# Altium PCB F4x1_Dev.PcbDoc
Units mil, origin at the board's own origin, x right, y up, seen from the top; angles counter-clockwise.
Board outline 2000 x 800 mil, 4 copper layers (Top Layer, G1, G2, Bottom Layer), stack 46.904 mil thick; 50 components, 57 nets, 232 pads, 79 vias.
Unrouted connection lines stored in the file: 3.
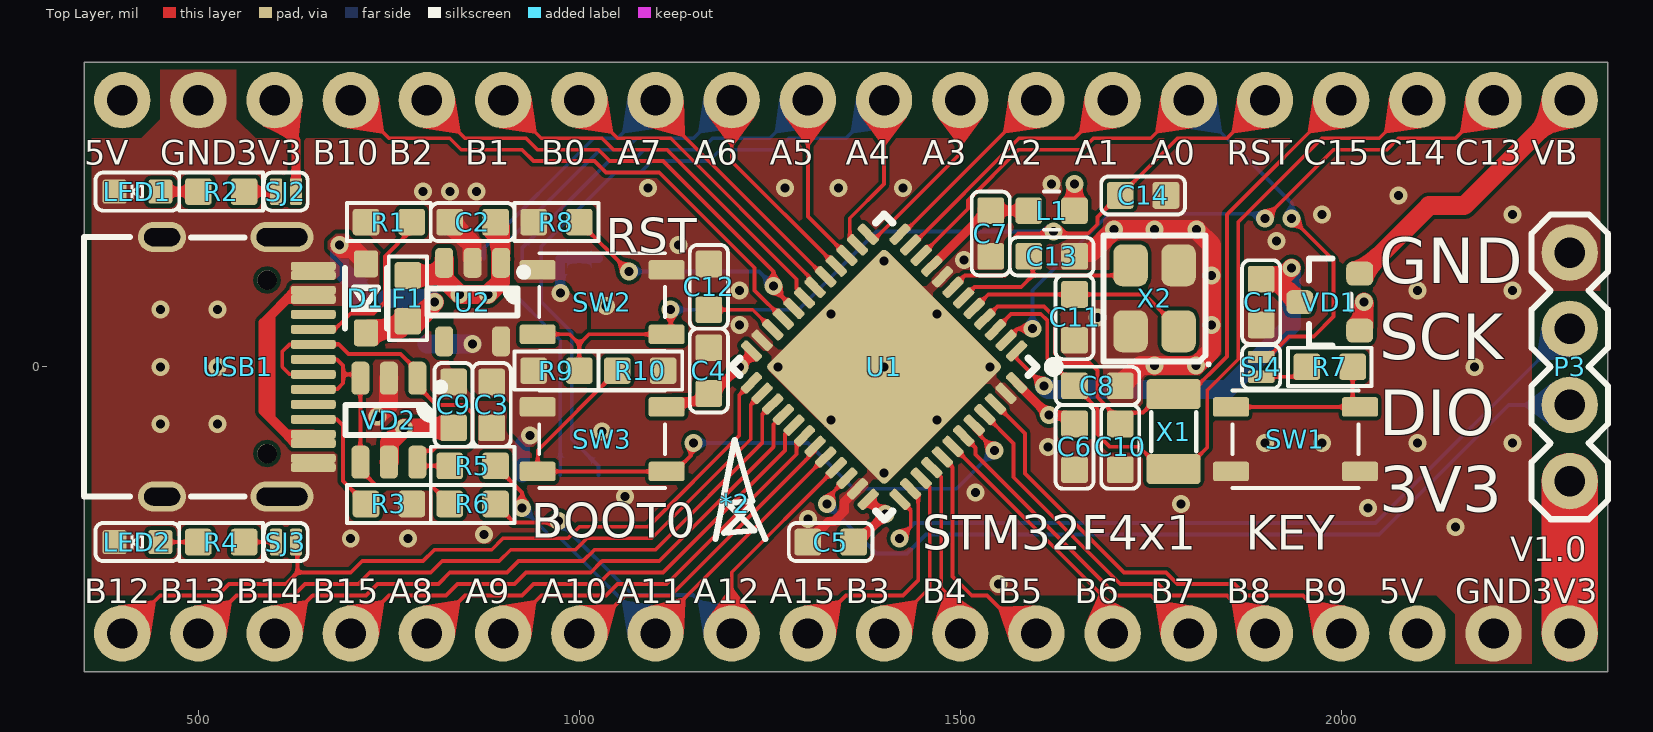
[diagram p0: Top Layer view]
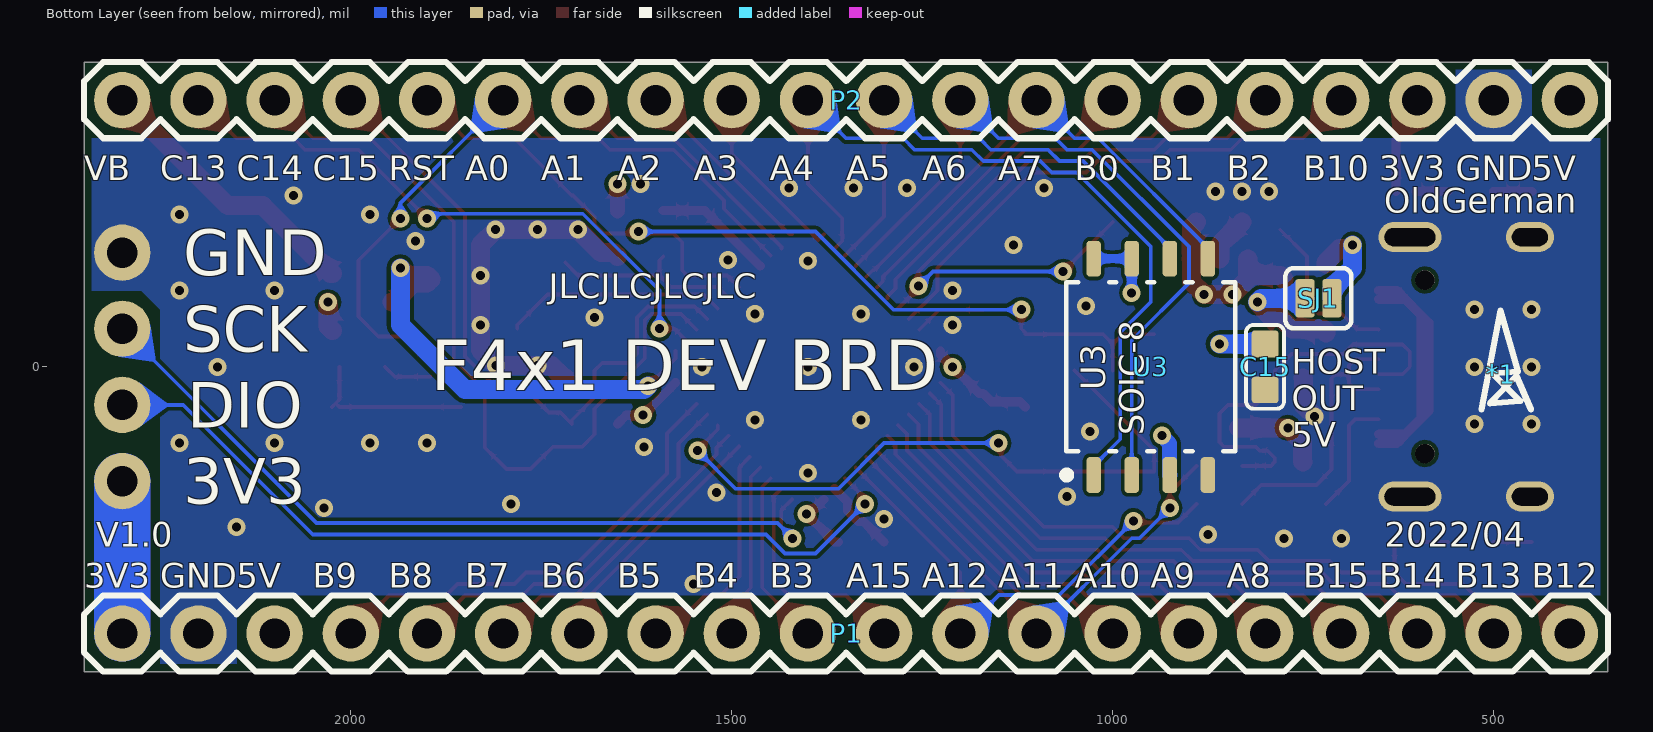
[diagram p1: Bottom Layer view, seen from below]
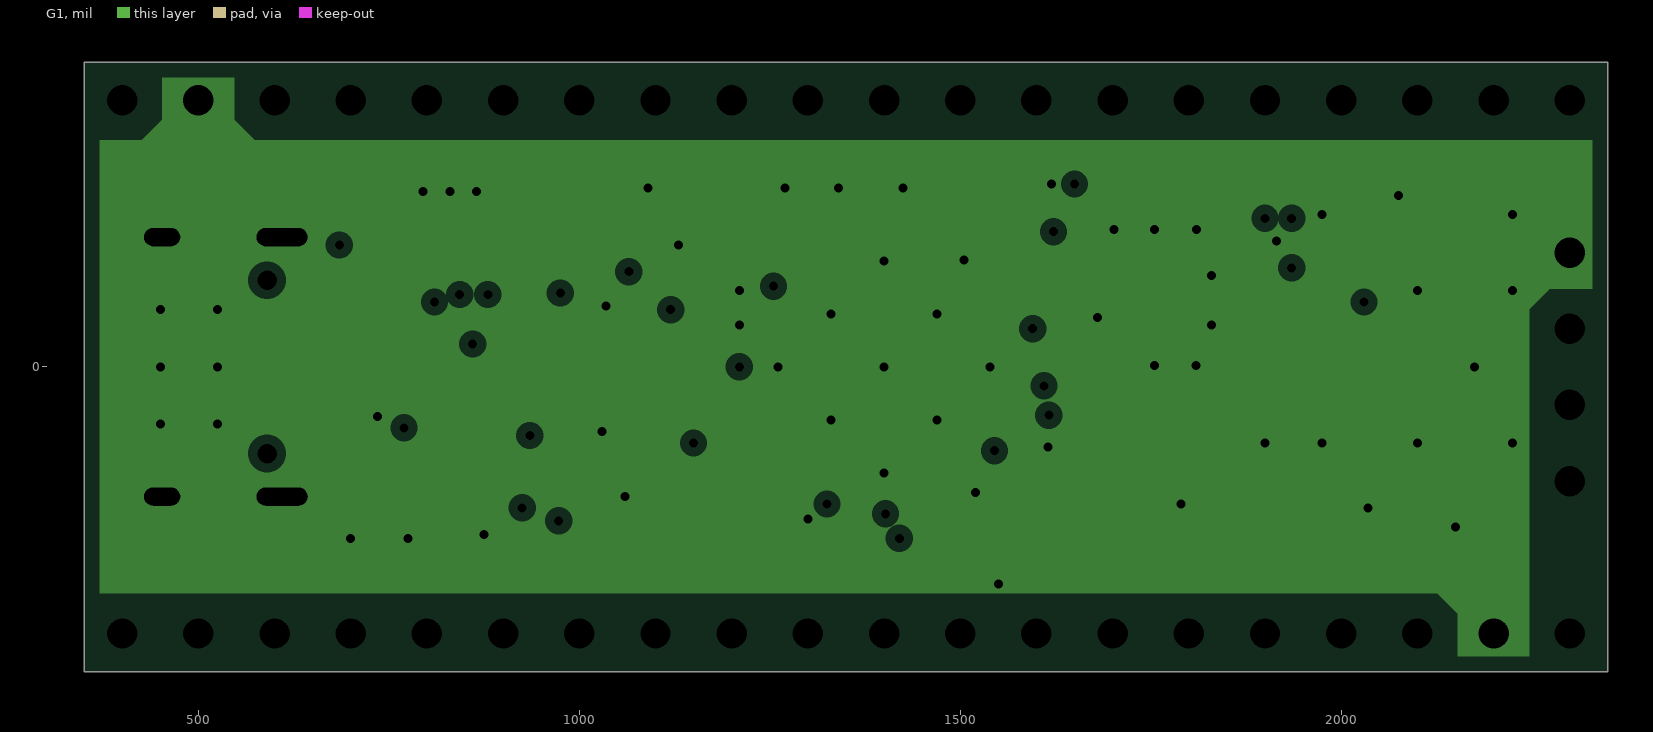
[diagram p2: G1, clearances drawn from the general rule]
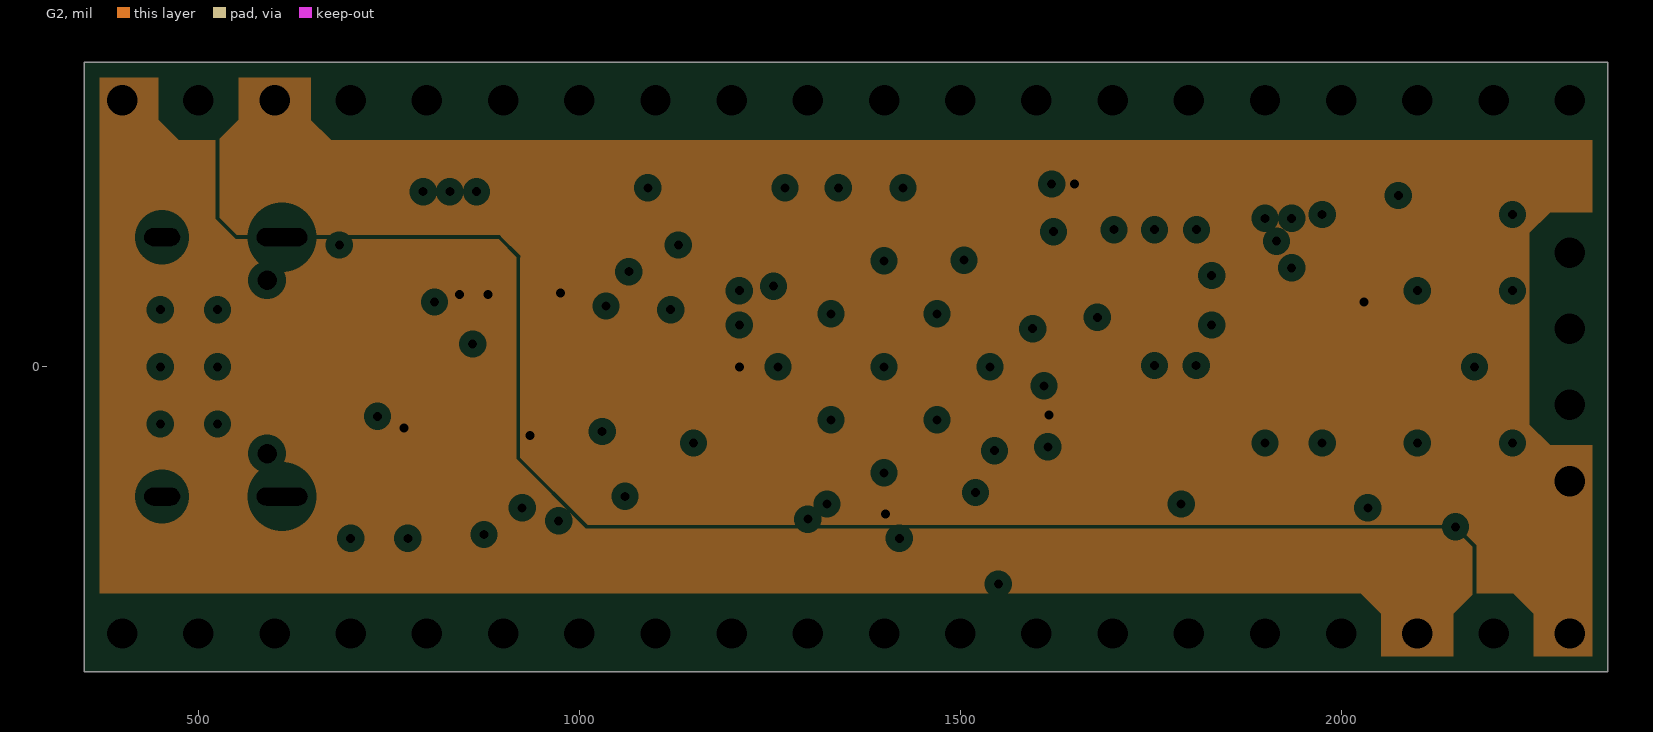
[diagram p3: G2, clearances drawn from the general rule]
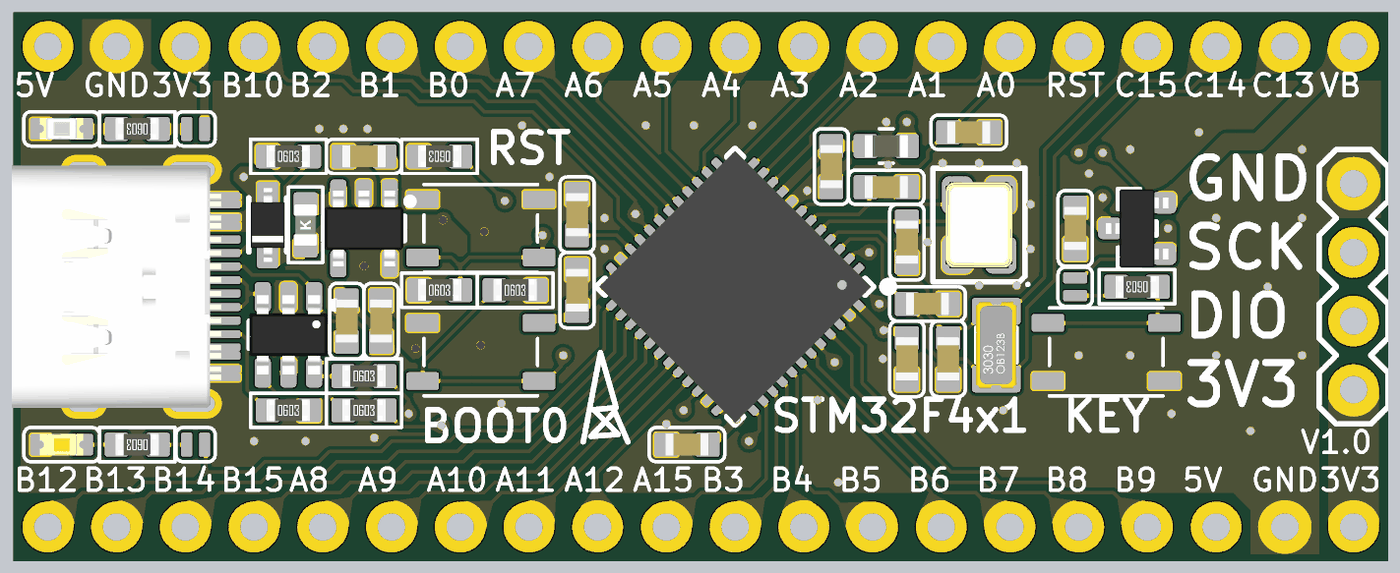
[diagram p4: 3D render of the assembled board from above, using the file's embedded part models]

## Layer stack, top to bottom
Top Solder: solder mask 0.4, Solder Resist, Dk 3.5
Top Layer: signal copper 1.4
Dielectric 2: prepreg 2.8, PP-006, Dk 4.1
G1: plane copper 1.3779, net GND
Dielectric 1: dielectric 35.748, FR-4, Dk 4.8
G2: plane copper 1.3779, net (Multiple Nets)
Dielectric 3: prepreg 2.8, PP-006, Dk 4.1
Bottom Layer: signal copper 1.4
Bottom Solder: solder mask 0.4, Solder Resist, Dk 3.5

## Board outline
350,-400 350,400 2350,400 2350,-400

## Design rules (kind name [scope] priority, off if disabled: settings)
BoardOutlineClearance [All] p1: gap=0 ignorepadtopadclearanceinfootprint=FALSE except(10: Poly-OutlineEdge Poly-CavityEdge Poly-CutoutEdge Poly-SplitBarrior)
Clearance [All] p1: gap=5 ignorepadtopadclearanceinfootprint=FALSE except(0: Arc-Hole Track-Hole SMDPad-Hole THPad-Hole Via-Hole Fill-Hole Poly-Hole Region-Hole Text-Hole)
HoleSize [All] p1: absolutevalues=TRUE maxlimit=196.85 minlimit=11.81 maxpercent=80.000 minpercent=20.000
MinimumSolderMaskSliver [All] p1: minsoldermaskwidth=0
PlaneClearance [All] p1: clearance=12
PlaneConnect [All] p1: planeconnectstyle=Direct reliefexpansion=20 reliefentries=4 reliefconductorwidth=10 reliefairgap=10
PolygonConnect [All] p1: connectstyle=Direct reliefconductorwidth=10 reliefentries=4 polygonreliefangle="90 Angle" airgapwidth=10
RoutingVias [All] p1: holewidth=11.81 width=23.62 viastyle="Through Hole" minholewidth=11.81 minwidth=23.62 maxholewidth=196.85 maxwidth=208.66
SilkToSilkClearance [All] p1: silktosilkclearance=0
SilkToSolderMaskClearance [IsPad] p1: minsilkscreentomaskgap=0 clearancetoexposedcopper=TRUE
SolderMaskExpansion [All] p1: expansion=2
Width [All] p1: maxlimit=100 minlimit=5 preferedwidth=5
24 further rules are at their usual default settings.

## Components (designator, comment, footprint, x,y, rotation, side; value= is the part's Value field where it differs from the comment)
*1 "ODG_LOGO" ODG_LOGO 490,-10 r180 bottom
*2 "ODG_LOGO" ODG_LOGO 1205,-180 r0 top
C1 "100nF" C0603 1895,85 r270 top value=0.1u
C2 "1uF/X7R" C0603 860,190 r0 top value=0.1u
C3 "1uF/X7R" C0603 885,-50 r90 top value=0.1u
C4 "100nF" C0603 1170,-5 r270 top value=0.1u
C5 "100nF" C0603 1330,-230 r180 top value=0.1u
C6 "100nF" C0603 1650,-105 r270 top value=0.1u
C7 "100nF" C0603 1540,175 r90 top value=0.1u
C8 "6pF" C0603 1680,-25 r0 top value=0.1u
C9 "100nF" C0603 835,-50 r270 top value=0.1u
C10 "6pF" C0603 1710,-105 r270 top value=0.1u
C11 "10pF" C0603 1650,65 r270 top value=0.1u
C12 "2.2uF" C0603 1170,105 r270 top value=0.1u
C13 "10pF" C0603 1620,145 r0 top value=0.1u
C14 "100nF" C0603 1740,225 r180 top value=0.1u
C15 "100nF" C0603 800,0 r90 bottom value=0.1u
D1 "B5819W" SOD-323 720,90 r270 top
F1 "6V/0.5A" FUSE0603_0.5MM 775,90 r90 top
L1 "10uH" FER0603 1620,205 r180 top
LED1 "LED" LED0603_GREEN 420,230 r180 top locked value=color?
LED2 "LED" LED0603_YELLOW 420,-230 r180 top locked value=color?
P1 "CONN_X20" 2.54MM_MALE_X20 400,-350 r0 bottom locked
P2 "CONN_X20" 2.54MM_MALE_X20 400,350 r0 bottom locked
P3 "CONN_X4" 2.54mm_Male_x4 2300,-150 r90 top
R1 "5.1K" R0603 750,190 r0 top value=22R
R2 "5.1K" R0603 530,230 r180 top locked value=22R
R3 "5.1K" R0603 750,-180 r0 top value=22R
R4 "5.1K" R0603 530,-230 r180 top locked value=22R
R5 "22R" R0603 860,-130 r0 top
R6 "22R" R0603 860,-180 r0 top
R7 "330R" R0603 1985,0 r180 top value=22R
R8 "10K" R0603 970,190 r180 top value=22R
R9 "10K" R0603 970,-5 r0 top value=22R
R10 "10K" R0603 1080,-5 r0 top value=22R
SJ1 "SJ_2P" SJ_2P 730,90 r0 bottom
SJ2 "SJ_2P" SJ_2P_MINI 615,230 r180 top locked
SJ3 "SJ_2P" SJ_2P_MINI 615,-230 r180 top
SJ4 "SJ_2P" SJ_2P_MINI 1895,0 r270 top
SW1 "Button-4P" SWITCH_3X4X2.5_4PIN_SMD 1940,-95 r0 top locked
SW2 "Button-4P" SWITCH_3X4X2.5_4PIN_SMD 1030,85 r0 top locked
SW3 "Button-4P" SWITCH_3X4X2.5_4PIN_SMD 1030,-95 r180 top locked
U1 "STM32F4x1CxU6" UFQFPN-48_7X7X0P55MM_VIA 1400,0 r225 top
U2 "ME6211C33M5G" "ANALOG TSOT-23-5 UJ-5" 860,85 r270 top
U3 "W25Q32JVSSIQ" WIN_SS-8_WIN-L 950,0 r90 bottom
USB1 "Type-C" Type-C-TOP 350,0 r180 top locked
VD1 "BAT54C" "ON SEMI SOT-23-3" 1985,85 r180 top
VD2 "USBLC6-2" "MICROCHIP SOT-23-6 M6" 750,-70 r270 top
X1 "32.768KHz" XTAL_2P_3215 1780,-85 r90 top locked
X2 "8MHz" "EPSON TSX-3225" 1755,90 r90 top locked

## Footprints (in the part's own frame and the unit in brackets; to place one, negate y for a bottom-side part, rotate by r counter-clockwise, add the part's x,y. Pads: shape width x height; smd on the part's side, far side on the other; paste and mask are expansions set on the pad)
2.54mm_Male_x4 [mil]
  round 74 hole 40: 1(0,0) 2(100,0) 3(200,0) 4(300,0)
  silkscreen extent -50,-50 350,50
2.54MM_MALE_X20 [mil]
  round 74 hole 40: 1(0,0) 2(100,0) 3(200,0) 4(300,0) 5(400,0) 6(500,0) 7(600,0) 8(700,0) 9(800,0) 10(900,0) 11(1000,0) 12(1100,0) 13(1200,0) 14(1300,0) 15(1400,0) 16(1500,0) 17(1600,0) 18(1700,0) 19(1800,0) 20(1900,0)
  silkscreen extent -50,-50 1950,50
"ANALOG TSOT-23-5 UJ-5" [mm] "SOT23, 5-Leads, Body 2.90x1.60mm, Pitch 0.95mm, IPC Medium Density"
  rrect50% 1x0.6 smd: 1(-1.31,0.95) 2(-1.31,0) 3(-1.31,-0.95) 4(1.31,-0.95) 5(1.31,0.95)
  silkscreen extent -1.12,-1.5 0.45,1.83, body extent -1.4,-1.45 1.4,1.45, height 1
C0603 [mil]
  rrect20% 35x35 smd: 1(-30,0) 2(30,0)
  silkscreen extent -55,-25 55,25, body extent -31,-16 32,16, height 32
"EPSON TSX-3225" [mm] "Crystal, 4-Leads, Body 2.50x3.20mm, Pitch 2.20mm, IPC Medium Density"
  rrect50% 1.4x1.15 smd: 1(-1.1,-0.8) 2(1.1,-0.8) 3(1.1,0.8) 4(-1.1,0.8)
  silkscreen extent -2.25,-1.85 2.1,1.7, body extent -1.61,-1.26 1.61,1.26, height 0.6
FER0603 [mil]
  rrect25% 35x35 smd: 1(-30,0) 2(30,0)
  silkscreen extent -10,-25 10,25, body extent -31,-16 32,16, height 32
FUSE0603_0.5MM [mil]
  rrect25% 35x35 smd: 1(-30,0) 2(30,0)
  silkscreen extent -55,-25 55,25, body extent -30,-17 30,17, height 23
LED0603_GREEN [mm] "Chip Diode, 2-Leads, Body 1.60x0.80mm, IPC Medium Density"
  rrect20% 0.8x0.8 smd: 1(-0.762,0) 2(0.762,0)
  silkscreen extent -1.4,-0.64 1.4,0.64, body extent -0.8,-0.4 0.8,0.4, height 0.53
LED0603_YELLOW [mm] "Chip Diode, 2-Leads, Body 1.60x0.80mm, IPC Medium Density"
  rrect20% 0.8x0.8 smd: 1(-0.762,0) 2(0.762,0)
  silkscreen extent -1.4,-0.64 1.4,0.64, body extent -0.8,-0.4 0.8,0.4, height 0.53
"MICROCHIP SOT-23-6 M6" [mm] "SOT23, 6-Leads, Body 2.90x2.80mm, Pitch 0.95mm, IPC Medium Density"
  rrect50% 1.1x0.6 smd: 1(-1.4,0.95) 2(-1.4,0) 3(-1.4,-0.95) 4(1.4,-0.95) 5(1.4,0) 6(1.4,0.95)
  silkscreen extent -1.22,-1.45 0.5,1.85, body extent -1.46,-1.45 1.46,1.45, height 1.45
ODG_LOGO [mil]
  silkscreen extent -26,-46 39,84
"ON SEMI SOT-23-3" [mm] "SOT23, 3-Leads, Body 2.90x2.40mm, Pitch 0.95mm, IPC Medium Density"
  rrect50% 0.9x0.8 smd: 1(-1,0.95) 2(-1,-0.95) 3(1,0)
  silkscreen extent -0.7,-1.45 0.7,1.45, body extent -1.16,-1.45 1.16,1.45, height 1
R0603 [mil]
  rrect25% 35x35 smd: 1(-30,0) 2(30,0)
  silkscreen extent -55,-25 55,25, body extent -31,-16 31,16, height 18
SJ_2P [mil]
  rrect25% 25x50 smd: 1(-17.62,0) 2(17.62,0)
  silkscreen extent -43,-39 43,39
SJ_2P_MINI [mil]
  rrect30% 16x35 smd: 1(-13,0) 2(13,0)
  silkscreen extent -29,-25 29,25
SOD-323 [mm]
  rrect25% 0.9x0.8 smd: 1(-1.15,0) 2(1.15,0)
  silkscreen extent -1,-0.7 1,0.7, body extent -1.36,-0.62 1.36,0.63, height 1.05
SWITCH_3X4X2.5_4PIN_SMD [mm]
  rrect25% 1.2x0.65 smd: 1(-2.15,1.075) 2(2.15,1.075) 3(-2.15,-1.075) 4(2.15,-1.075)
  silkscreen extent -2.1,-1.63 2.1,1.63, body extent -2.55,-1.6 2.55,1.6, height 2.5
Type-C-TOP [mm]
  round 0.65 hole 0.65: 0(-6.1,-2.89) 0_1(-6.1,2.89)
  oval 1.6x1 hole 0.6 slot 1.2 at 0 deg: 1(-2.6,4.325) 2(-2.6,-4.325)
  oval 2.1x1 hole 0.6 slot 1.7 at 0 deg: 3(-6.6,-4.325) 4(-6.6,4.325)
  rrect50% 1.5x0.3 smd: A1(-7.64,-3.35) A4(-7.64,-2.55) A5(-7.64,-1.25) A6(-7.64,-0.25) A7(-7.64,0.25) A8(-7.64,1.25) A9(-7.64,2.55) A12(-7.64,3.35) B1(-7.64,3.05) B4(-7.64,2.25) B5(-7.64,1.75) B6(-7.64,0.75) B7(-7.64,-0.75) B8(-7.64,-1.75) B9(-7.64,-2.25) B12(-7.64,-3.05)
  silkscreen extent -5.34,-4.33 0,4.33, body extent -7.69,-4.48 0.06,4.48, height 3.26
UFQFPN-48_7X7X0P55MM_VIA [mm] "STM32_QFN48"
  rrect50% 0.8x0.3 smd: 1(-3.5,2.75) 2(-3.5,2.25) 3(-3.5,1.75) 4(-3.5,1.25) 5(-3.5,0.75) 6(-3.5,0.25) 7(-3.5,-0.25) 8(-3.5,-0.75) 9(-3.5,-1.25) 10(-3.5,-1.75) 11(-3.5,-2.25) 12(-3.5,-2.75) 25(3.5,-2.75) 26(3.5,-2.25) 27(3.5,-1.75) 28(3.5,-1.25) 29(3.5,-0.75) 30(3.5,-0.25) 31(3.5,0.25) 32(3.5,0.75) 33(3.5,1.25) 34(3.5,1.75) 35(3.5,2.25) 36(3.5,2.75)
  rrect50% 0.3x0.8 smd: 13(-2.75,-3.5) 14(-2.25,-3.5) 15(-1.75,-3.5) 16(-1.25,-3.5) 17(-0.75,-3.5) 18(-0.25,-3.5) 19(0.25,-3.5) 20(0.75,-3.5) 21(1.25,-3.5) 22(1.75,-3.5) 23(2.25,-3.5) 24(2.75,-3.5) 37(2.75,3.5) 38(2.25,3.5) 39(1.75,3.5) 40(1.25,3.5) 41(0.75,3.5) 42(0.25,3.5) 43(-0.25,3.5) 44(-0.75,3.5) 45(-1.25,3.5) 46(-1.75,3.5) 47(-2.25,3.5) 48(-2.75,3.5)
  rrect5% 5.6x5.6 smd paste-10: 49(0,0)
  round 0.6 hole 0.3 mask-10: 49_1(0,0) 49_2(0,2.5) 49_3(0,-2.5) 49_4(-2.5,-2.5) 49_5(-2.5,0) 49_6(-2.5,2.5) 49_7(2.5,2.5) 49_8(2.5,-2.5) 49_9(2.5,0)
  silkscreen extent -4.14,-3.6 3.6,4.14, body extent -3.56,-3.56 3.56,3.56, height 0.61
WIN_SS-8_WIN-L [mil]
  rrect50% 47x19 smd paste+0 mask+0: 1(-142,75) 2(-142,25) 3(-142,-25) 4(-142,-75) 5(142,-75) 6(142,-25) 7(142,25) 8(142,75)
  silkscreen extent -147,-111 111,115, body extent -159,-106 159,106, height 85
XTAL_2P_3215 [mm]
  rrect25% 1x1.8 smd: 1(-1.25,0) 2(1.25,0)
  silkscreen extent -0.65,-0.75 0.65,0.75, body extent -1.6,-0.75 1.6,0.75, height 0.9

## Part data
C1 C2 C3 C4 C5 C6 C7 C8 C9 C10 C11 C12 C13 C14 C15: library part CAP, "Capacitor"
D1: library part DIODE, "二极管"
F1: library part FUSE, "贴片自恢复保险丝"
L1: library part inductor_mini, "贴片叠层电感"
R1 R2 R3 R4 R5 R6 R7 R8 R9 R10: library part RES, "Resistor"
SJ1 SJ2 SJ3 SJ4: "焊接跳线"
SW1 SW2 SW3: "Button"
U1: library part STM32F411CEU7, "No Description Available", Mfr_Name=STMicroelectronics, Copyright="Copyright (C) 2022 Ultra Librarian. All rights reserved.", Manufacturer_Part_Number=STM32F411CEU7, RefDes=RefDes, Type=DEV
U2: "线性稳压芯片", 学习资源=www.o
U3: library part W25Qxx, "No Description Available", Manufacturer_Part_Number=W25Q16DVSSIG, Mfr_Name=Winbond, Copyright="Copyright (C) 2022 Ultra Librarian. All rights reserved.", RefDes=RefDes, Type=DEV
USB1: library part USB-Type-C_16P
VD1: "贴片肖特基二极管", BOM名称=Ф, 学习资源=www.oooc, 属性=30V/0.
VD2: "Very low capacitance ESD protection / Features / ? 2 data-line protection / ? Protects VBUS / ? Very low capacitance: 3.5 pF max. / ? Very low leakage current: 150 nA max. / ? SOT-666 and SOT23-6L packages / ? RoHS compliant", 学习资源=www.o, 属性=30V/0
X1: library part XTAL-2P, "2脚无源石英晶振", BOM名称=4½, 学习资源=www.oooc
X2: library part XTAL-4P, "4脚无源石英晶振", BOM名称=4½, 学习资源=www.oooc

## Via types
v1: diameter 23.62, hole 11.81, Top Layer to Bottom Layer, tented both sides, 79 vias

## Nets (pads, with @x,y where several pads share a name; then routed paths per layer and width w, separated by ;. In a path a pad name is that pad's centre, name@x,y a point inside that pad or via, vN(x,y) a via of type N, cw(c..) or ccw(c..) an arc to the next point about the centre after c; other vN are vias at no path point)
+3V3: C3.2 C4.2 C5.1 C6.1 C15.2 L1.1 P1.20 P2.3 P3.1 R9.1 SJ2.1 SW3.3 SW3.4 U1.24 U1.36 U1.48 U2.5 U3.3 U3.7 U3.8 VD1.1 | length 1150.6
  Top Layer w12: P2.3 600,325 628,297 SJ2.1 ; SW3.3 1121.44,-45.88 1159.12,-45.88 C4.2 1175,-35 v1(1210,0) 1226.01,16.01 U1.24 ; C5.1 1365,-230 v1(1402,-193) 1402,-193.06 1400.06,-195 1379.12,-174.06 U1.36 ; U1.48 1580.82,-27.7 1580.82,-28.08 v1(1616.24,-63.5) 1638.5,-63.5 C6.1
  Top Layer w20: L1.1 v1(1650,240)
  Top Layer w25: VD1.1 2030,53.23 v1(2030,85)
  Top Layer w74: P1.20 P3.1
  Bottom Layer w12: v1(975,97) U3.7 U3.8
  Bottom Layer w20: U3.3 925.5,-141.5 925.5,-100.48 935,-90.98 v1(935,-90)
  Bottom Layer w25: C15.2 v1(860,30)
  Bottom Layer w74: P1.20 P3.1
+5: D1.1 SJ1.1 USB1.A4 USB1.A9 USB1.B4 USB1.B9 | length 674
  Top Layer w12: USB1.B4@650.69,-88.49 616.32,-88.49 595,-67.17 595,67.35 616.32,88.68 USB1.B9@650.69,88.68 ; USB1.A9 627.35,-100.39 585,-58.04 585,58.04 627.35,100.39 USB1.A4
  Top Layer w25: v1(685,160) 690,155 702.24,155 720,137.24 D1.1
  Bottom Layer w25: v1(685,160) 685,129.88 712.38,102.5 SJ1.1
BOOT0: R10.1 SW3.1 SW3.2 U1.44 | length 888.3
  Top Layer w5: R10.1 945.35,-109.65 SW3.2 SW3.1 1125.47,-137.32 1146.44,-116.36 1146.44,-103.56 v1(1150,-100) ; U1.44 1518.32,-82.44 1545,-109.12 v1(1545,-110)
  Bottom Layer w5: v1(1150,-100) 1300,-100 1360,-160 1495,-160 v1(1545,-110)
D+: R6.1 USB1.A6 USB1.B6 VD2.3 VD2.4 | length 389.1
  Top Layer w5: USB1.B6 682.05,-29.53 690,-21.57 690,-10 ; USB1.A6 681.73,9.84 690,1.57 690,-10 ; R6.1 805,-155 732.64,-155 712.6,-134.96 VD2.4 VD2.3 707.72,-10 690,-10
D-: R5.1 USB1.A7 USB1.B7 VD2.1 VD2.6 | length 536.8
  Top Layer w5: USB1.A7 619.84,-9.84 610,0 610,20 619.53,29.53 USB1.B7 684.47,29.53 697,17 765.36,17 787.4,-5.04 VD2.1 787.4,-24.72 812.68,-50 848.56,-50 860,-61.44 860,-98.56 853.56,-105 811.96,-105 806.71,-110.24 796.45,-110.24 787.4,-119.3 VD2.6 792.28,-130 R5.1
F_CS: P2.11 U1.14 U3.1 | length 1078.3
  Top Layer w5: U1.14@1365.2,155.07 1355,165.27 1355,195 1400,240 P2.11
  Bottom Layer w5: U3.1 1025,-130 990,-95 990,45 950,85 950,157.82 1047.18,255 1080,255 1095,270 1170,270 1185,285 1260,285 1275,300 1350,300 P2.11
GND: C1.2 C2.1 C3.1 C4.1 C5.2 C6.2 C7.1 C8.2 C9.1 C10.2 C11.2 C12.1 C13.2 C14.1 C15.1 LED1.2 LED2.2 P1.19 P2.2 P3.4 R1.1 R3.2 R8.2 R10.2 SW1.3 SW1.4 SW2.1 SW2.2 U1.8 U1.23 U1.35 U1.47 U1.49 U1.49_1 U1.49_2 U1.49_3 U1.49_4 U1.49_5 U1.49_6 U1.49_7 U1.49_8 U1.49_9 U2.2 U3.4 USB1.1 USB1.2 USB1.3 USB1.4 USB1.A1 USB1.A12 USB1.B1 USB1.B12 VD2.2 X2.2 X2.4 | length 698.9
  Top Layer w12: C5.2 1327.19,-202.81 1334.45,-202.81 1347.81,-189.45 1347.81,-177.46 U1.35
  Top Layer w25: v1(735,-65) 749.31,-50.69 749.31,-15.57 VD2.2 ; C2.1 859.31,160.69 859.31,142.26 U2.2@860,141.57 ; C13.2 1655,150 1671.88,150 v1(1701.88,180) v1(1755,180) v1(1810,180) 1830,160 v1(1830,120) v1(1830,55) 1830,21.88 v1(1809.75,1.63) v1(1755,1.63) ; C8.2 1736.63,1.63 v1(1755,1.63) ; v1@1755,1.4 v1(1755,1.63)
  other v1: 1550,-285 700,-225 775,-225 875,-220 2150,-210 1300,-200 2035,-185 1790,-180 1060,-170 1520,-165 1615,-105 1900,-100 1975,-100 2100,-100 2225,-100 1030,-85 450,-75 525,-75 450,0 525,0 2175,0 1210,55 1680,65 450,75 525,75 1035,80 1210,100 2100,100 2225,100 1505,140 1130,160 1915,165 1975,200 2225,200 2075,225 795,230 830,230 865,230 1090,235 1270,235 1340,235 1425,235 1620,240
MISO: P2.9 U1.16 U3.2 | length 985.2
  Top Layer w5: P2.9 1200,269.59 U1.16
  Bottom Layer w5: U3.2 975,35 900,110 900,157.82 1027.18,285 1060,285 1075,300 1150,300 P2.9
MOSI: P2.8 U1.17 U3.5 | length 644.6
  Top Layer w5: P2.8 1100,340 1313.24,126.76 1315,126.76 U1.17
  Bottom Layer w5: U3.5 875,156 1019,300 1050,300 P2.8
NetC12_2: C12.2 U1.22 | length 94.7
  Top Layer w5: C12.2 1227.56,75 U1.22
NetD1_2: D1.2 F1.1 SJ1.2 | length 172.3
  Top Layer w25: D1.2 720,46.69 723.25,49.94 764.94,49.94 F1.1 780,65 790,65 v1(810,85)
  Bottom Layer w25: SJ1.2 805,90 v1(810,85)
NetLED1_1: LED1.1 R2.2 | length 50
  Top Layer w12: LED1.1 R2.2
NetLED2_1: LED2.1 R4.2 | length 50
  Top Layer w5: LED2.1 R4.2
NetR1_2: R1.2 USB1.A5 | length 218.5
  Top Layer w5: USB1.A5 650.88,49.3 679.3,49.3 700,70 730,70 745,85 745,145 R1.2@780,180
NetR2_1: R2.1 SJ2.2 | length 42
  Top Layer w12: R2.1 SJ2.2
NetR3_1: R3.1 USB1.B5 | length 158
  Top Layer w5: USB1.B5 681.97,-68.9 690,-76.93 690,-150 R3.1
NetR4_1: R4.1 SJ3.2 | length 42
  Top Layer w5: R4.1 SJ3.2
NetR7_1: R7.1 SW1.1 SW1.2 | length 223.1
  Top Layer w5: SW1.1 2015,-52.68 SW1.2@2019.82,-47.85 ; R7.1 2015,-43.03 SW1.2@2019.82,-47.85 ; SW1.2 SW1.2@2019.82,-47.85
NetR7_2: R7.2 SJ4.2 | length 65.4
  Top Layer w5: SJ4.2 1942,-13 R7.2
NRST: C14.2 P2.16 R9.2 SW2.3 SW2.4 U1.7 | length 1328.9
  Top Layer w5: SW2.3 987.32,42.68 1000,30 ; R9.2 1000,30 ; SW2.4 1012.68,42.68 1000,30 ; SW2.4@1115,45 1120,50 v1(1120,75) ; U1.7 1506.08,120 1558.56,120 1565,126.44 1565,163.56 1576.44,175 1668.04,175 1680.2,187.15 1680.2,196.69 C14.2@1708.5,224.99 ; C14.2 1785,300 1850,300 P2.16
  Bottom Layer w5: v1(1120,75) 1287.52,75 1390.02,177.5 v1(1622.5,177.5)
PA0: P2.15 SJ4.1 U1.10 | length 921.9
  Top Layer w5: U1.10 1510,207.44 1510,218.56 1576.44,285 1660,285 1675,300 1750,300 P2.15 ; SJ4.1 1904.5,13 1931.5,40 1964,40 1990,66 1990,140 v1(1935,195)
  Bottom Layer w5: P2.15 1935,215 v1(1935,195)
PA1: P2.14 U1.11 | length 347.4
  Top Layer w5: U1.11@1434.8,155.07 1434.8,157.49 1577.3,300 1650,300 P2.14
PA2: P2.13 U1.12 | length 252
  Top Layer w5: U1.12 1423.99,173.99 P2.13
PA3: P2.12 U1.13 | length 240.9
  Top Layer w5: U1.13 1386.56,166.56 1500,280 P2.12
PA5: P2.10 U1.15 U3.6 | length 694.4
  Top Layer w5: P2.10 1300,197.44 U1.15
  Bottom Layer w5: U3.6 925,156 1039,270 1070,270 1085,285 1160,285 1175,300 1250,300 P2.10
PA8: P1.5 U1.29 | length 607.7
  Top Layer w5: P1.5 850,-300 925,-300 940,-285 1025,-285 1040,-270 1110,-270 1270,-110 1270,-88.24 U1.29
PA9: P1.6 U1.30 | length 511.1
  Top Layer w5: P1.6 950,-300 1035,-300 1050,-285 1114.78,-285 1285,-114.78 1285,-101.08 U1.30
PA10: P1.7 U1.31 | length 414.8
  Top Layer w5: P1.7 1010,-350 1060,-300 1120,-300 1309.52,-110.48 U1.31
PA11: P1.8 R5.2 U1.32 | length 637.1
  Top Layer w5: R5.2 925,-165 v1(925,-185) ; P1.8 1100,-341.76 U1.32
  Bottom Layer w5: v1(925,-185) 965,-225 975,-225 P1.8
PA12: P1.9 R6.2 U1.33 | length 656.9
  Top Layer w5: R6.2 914.31,-204.31 970.69,-204.31 v1(972.88,-202.12) ; P1.9 1200,-269.6 U1.33
  Bottom Layer w5: v1(972.88,-202.12) 1070.16,-299.4 1149.4,-299.4 P1.9
PA13: P3.2 U1.34 | length 1127.4
  Top Layer w5: v1(1325,-180) 1325,-172.44 U1.34
  Bottom Layer w5: v1(1325,-180) 1390,-245 1430,-245 1455,-220 2050,-220 2220,-50 P3.2
PA14: P3.3 U1.37 | length 1057
  Top Layer w5: v1(1420,-225) 1435,-210 1435,-188.12 U1.37
  Bottom Layer w5: v1(1420,-225) 1440,-205 2045,-205 P3.3
PA15: P1.10 U1.38 | length 298.1
  Top Layer w5: P1.10 1350,-300 1425,-300 1445,-280 1445,-170.27 U1.38
PB0: P2.7 U1.18 | length 414.8
  Top Layer w5: P2.7 1050,300 1120,300 1301.86,118.14 1301.86,112.06 U1.18
PB1: P2.6 U1.19 | length 511.3
  Top Layer w5: P2.6 950,300 1030,300 1045,285 1115,285 1285,115 1285,102.75 1295.61,92.14 U1.19
PB2: P2.5 R8.1 U1.20 | length 897.5
  Top Layer w5: P2.5 850,300 930,300 945,285 1025,285 1040,270 1110,270 1255,125 v1(1255,105.96) 1255,103.24 U1.20 ; R8.1 v1(1065,125)
  Bottom Layer w5: v1(1065,125) 1235.96,125 v1(1255,105.96)
PB3: P1.11 U1.39 | length 233.4
  Top Layer w5: P1.11 1460,-290 1460,-157.44 U1.39
PB4: P1.12 U1.40 | length 233.2
  Top Layer w5: U1.40 1475,-144.59 1475,-290 1500,-315 P1.12
PB5: P1.13 U1.41 | length 303.3
  Top Layer w5: U1.41 1490,-131.76 1490,-275 1515,-300 1535,-300 1585,-350 P1.13
PB6: P1.14 U1.42 | length 332.4
  Top Layer w5: U1.42 1685,-298.92 1685,-335 P1.14
PB7: P1.15 U1.43 | length 408.3
  Top Layer w5: U1.43 1520,-106.08 1520,-115 1705,-300 1750,-300 P1.15
PB8: P1.16 U1.45 | length 512.9
  Top Layer w5: U1.45 1570,-100.41 1570,-145 1710,-285 1760,-285 1775,-300 1850,-300 P1.16
PB9: P1.17 U1.46 | length 609.4
  Top Layer w5: U1.46 1585,-87.56 1585,-140 1715,-270 1770,-270 1785,-285 1860,-285 1875,-300 1950,-300 P1.17
PB10: P2.4 U1.21 | length 704.1
  Top Layer w5: P2.4 750,300 830,300 845,285 925,285 940,270 1020,270 1035,255 1105,255 1230,130 1230,100.41 U1.21
PB12: P1.1 SJ3.1 U1.25 | length 1034.3
  Top Layer w5: P1.1 450,-300 525,-300 540,-285 615,-285 630,-270 ; SJ3.1 630,-232 630,-270 ; U1.25 1210,-36.89 1210,-90 1090,-210 1000,-210 985,-225 900,-225 885,-240 810,-240 795,-255 715,-255 700,-270 630,-270
PB13: P1.2 U1.26 | length 897
  Top Layer w5: P1.2 550,-300 625,-300 640,-285 710,-285 725,-270 805,-270 820,-255 895,-255 910,-240 995,-240 1010,-225 1095,-225 1225,-95 1225,-49.73 U1.26
PB14: P1.3 U1.27 | length 800.6
  Top Layer w5: P1.3 650,-300 720,-300 735,-285 815,-285 830,-270 905,-270 920,-255 1005,-255 1020,-240 1100,-240 1240,-100 1240,-62.56 U1.27
PB15: P1.4 U1.28 | length 704.1
  Top Layer w5: P1.4 750,-300 825,-300 840,-285 915,-285 930,-270 1015,-270 1030,-255 1105,-255 1255,-105 1255,-75.4 U1.28
PC13: P2.19 U1.2 | length 805
  Top Layer w5: U1.2 1575.28,50 v1(1595,50) ; v1(1900,195) 1990,285 2060,285 2075,300 2150,300 P2.19
  Bottom Layer w5: v1(1595,50) 1595,100.43 1695.57,201 1894,201 v1(1900,195)
PC14: C8.1 P2.18 U1.3 X1.1 | length 1045.6
  Top Layer w5: U1.3 1566.75,69.31 1605.69,69.31 1614.31,60.69 1614.31,10.69 C8.1 1680,-55 1680,-88.56 1696.44,-105 1735,-105 1764.21,-134.21 X1.1 1795.75,-134.21 1824.23,-105.73 1824.23,-30.77 1865,10 1865,190 1975,300 2050,300 P2.18
PC15: C10.1 P2.17 U1.4 X1.2 | length 875.2
  Top Layer w5: U1.4 1548.91,79.31 1609.83,79.31 1624.31,64.83 1624.31,17.13 1636.44,5 1670,5 1680,-5 1680,-40 1710,-70 C10.1 1725,-60 1740,-60 1764.21,-35.79 X1.2 1800.62,-35.79 1850,13.6 1850,200 P2.17
PH0: C11.1 U1.5 X2.1 | length 292.3
  Top Layer w5: U1.5 1536.76,95 C11.1 1741.64,95 1781.5,55.14 X2.1@1781.5,50.22
PH1: C13.1 U1.6 X2.3 | length 260.4
  Top Layer w5: U1.6 1518.92,105 1580,105 1595,120 ; C13.1 1595,140 1595,120 ; X2.3@1718.5,136.83 1701.67,120 1595,120
VB: P2.20 VD1.2 | length 369.9
  Top Layer w25: VD1.2 2026.34,122.4 2115.42,211.49 2161.49,211.49 P2.20
VBAT: C1.1 U1.1 VD1.3 | length 607.3
  Top Layer w5: U1.1@1573.94,15.83 1573.94,11.06 v1(1610,-25) ; U1.1@1573.99,15.88 U1.1
  Top Layer w25: v1(1935,130) 1925,120 1900,120 C1.1 1900,110 1918.66,110 1943.66,85 VD1.3
  Bottom Layer w25: v1(1610,-25) 1615,-30 1850,-30 1935,55 v1(1935,130)
VCC: C2.2 C9.2 F1.2 P1.18 P2.1 U2.1 U2.3 VD2.5 | length 387
  Top Layer w25: VD2.5 750.69,-124.43 750.69,-99.31 765,-85 v1(770,-80) C9.2 ; F1.2@775,115 780,120 822.6,120 U2.3 822.6,141.57 823.29,140.89 823.29,114.64 v1(842.93,95) v1(880,95) 896.71,111.71 896.71,140.89 897.4,141.57 896.71,142.26 896.71,183.29 C2.2
VREF+: C7.2 L1.2 U1.9 | length 157.5
  Top Layer w12: U1.9 1535.4,205 C7.2 L1.2
pads on no net: U2.4 USB1.0 USB1.0_1 USB1.A8 USB1.B8

## Polygon pours and split planes (outlines as drawn)
GND on Top Layer "Bottom Layer-GND" (solid, remove dead copper, pour order 40): 350,300 425,300 450,325 450,400 550,400 550,325 575,300 2225,300 2350,300 2350,100 2275,100 2250,75 2250,-400 2150,-400 2150,-325 2125,-300 350,-300
+3V3 on Top Layer "Top Layer-+3V3" (solid, pour order 34): 1010,-40 945.26,-104.74 930.47,-105.47 909.71,-84.71 909.88,-49.76 900.12,-40 870,-40 835,-5 835,80 860,105 980,105 1010,75
+5 on Top Layer "Top Layer-+5 1" (solid, pour order 12): 685,110 625,110 620,105 620,85 625,80 720,80 740,100 740,150 715,175 680,175 670,165 670,155 690,135 690,115
no net on Bottom Layer "vcc-2" (solid, pour order 46): 1275,930
no net on Bottom Layer "vcc-2" (solid, pour order 44): 1295,915
no net on Bottom Layer "vcc-2" (solid, pour order 42): 1300,915
GND on Bottom Layer "Bottom Layer-GND" (solid, remove dead copper, pour order 30): 350,300 425,300 450,325 450,400 550,400 550,325 575,300 2225,300 2350,300 2350,100 2275,100 2250,75 2250,-400 2150,-400 2150,-325 2125,-300 350,-300
VCC on Bottom Layer "vcc-2" (solid, pour order 24): 862.6,61.72
VCC on Bottom Layer "vcc-2" (solid, pour order 22): 835,70
GND on G1 (split plane): 547.45,325 547.64,324.02 548.2,323.2 573.2,298.2 574.02,297.64 575,297.45 2329.9,297.45 2329.9,102.55 2275,102.55 2274.02,102.36 2273.2,101.8 2248.2,76.8 2247.64,75.98 2247.45,75 2247.45,-379.9 2152.55,-379.9 2152.55,-325 2152.36,-324.02 2151.8,-323.2 2126.8,-298.2 2125.98,-297.64 2125,-297.45 370.1,-297.45 370.1,297.45 425,297.45 425.98,297.64 426.8,298.2 451.8,323.2 452.36,324.02 452.55,325 452.55,379.9 547.45,379.9
VCC on G2 (split plane): 447.45,325 447.64,324.02 448.2,323.2 473.2,298.2 474.02,297.64 475,297.45 522.45,297.45 522.45,195 522.64,194.02 523.2,193.2 547.92,168.47 548.75,167.92 549.72,167.73 893.67,167.73 917.38,144.01 917.38,40 917.38,-119.93 917.58,-120.91 918.13,-121.73 1008.2,-211.8 1009.02,-212.36 1010,-212.55 2148.94,-212.55 2172.45,-236.06 2172.45,-298.94 2148.2,-323.2 2147.64,-324.02 2147.45,-325 2147.45,-379.9 2052.55,-379.9 2052.55,-325 2052.36,-324.02 2051.8,-323.2 2026.8,-298.2 2025.98,-297.64 2025,-297.45 370.1,-297.45 370.1,379.9 447.45,379.9
+3V3 on G2 (split plane): 647.45,325 647.64,324.02 648.2,323.2 673.2,298.2 674.02,297.64 675,297.45 2329.9,297.45 2329.9,202.55 2275,202.55 2274.02,202.36 2273.2,201.8 2248.2,176.8 2247.64,175.98 2247.45,175 2247.45,-75 2247.64,-75.98 2248.2,-76.8 2273.2,-101.8 2274.02,-102.36 2275,-102.55 2329.9,-102.55 2329.9,-379.9 2252.55,-379.9 2252.55,-325 2252.36,-324.02 2251.8,-323.2 2226.8,-298.2 2225.98,-297.64 2225,-297.45 2177.55,-297.45 2177.55,-235 2177.36,-234.02 2176.8,-233.2 2151.8,-208.2 2150.98,-207.64 2150,-207.45 1011.06,-207.45 922.48,-118.88 922.48,40 922.48,144.65 922.55,145 922.36,145.98 921.8,146.8 896.8,171.8 896.64,171.91 896.53,172.08 895.7,172.63 894.72,172.82 550.78,172.82 527.55,196.06 527.55,298.94 551.8,323.2 552.36,324.02 552.55,325 552.55,379.9 647.45,379.9

## Other copper
Top Layer:
  pour cut-out: 1390.26,-171.21 1379.12,-160.07 1379.12,-154.51 1386.08,-147.55 1391.65,-147.55 1395.13,-151.03 1404.87,-151.03 1533.63,-22.27 1539.19,-22.27 1546.15,-29.23 1546.15,-34.8 1409.74,-171.21
  pour cut-out: 1370.77,-146.15 1365.2,-146.15 1228.79,-9.74 1228.79,9.74 1239.93,20.88 1245.49,20.88 1252.45,13.92 1252.45,8.35 1248.97,4.87 1248.97,-4.87 1377.73,-133.63 1377.73,-139.19
  pour cut-out: 1554.51,-20.88 1547.55,-13.92 1547.55,-8.35 1551.03,-4.87 1551.03,4.87 1464.03,91.87 1464.03,97.44 1470.99,104.4 1476.56,104.4 1571.21,9.74 1571.21,-9.74 1560.07,-20.88
  pour cut-out: 1266.37,22.27 1260.81,22.27 1253.85,29.23 1253.85,34.8 1390.26,171.21 1409.74,171.21 1462.64,118.32 1462.64,112.75 1455.68,105.79 1450.11,105.79 1404.87,151.03 1395.13,151.03
G1 (plane layer: these items are gaps in the copper):
  region: 2250,-400 2250,75 2275,100 2350,100 2350,-400
  region: 350,-300 2125,-300 2150,-325 2150,-400 350,-400
  region: 2350,300 575,300 550,325 550,400 2350,400
  region: 350,300 425,300 450,325 450,400 350,400
  lines w5: 350,-400 2150,-400 2150,-325 2125,-300 350,-300 350,-400 ; 350,300 350,400 450,400 450,325 425,300 350,300 ; 550,325 550,400 2350,400 2350,300 575,300 550,325 ; 2250,-400 2250,75 2275,100 2350,100 2350,-400 2250,-400
G2 (plane layer: these items are gaps in the copper):
  region: 2225,-300 2250,-325 2250,-400 2150,-400 2150,-325 2175,-300
  region: 475,300 450,325 450,400 550,400 550,325 525,300
  region: 2250,-75 2275,-100 2350,-100 2350,200 2275,200 2250,175
  region: 350,-300 2025,-300 2050,-325 2050,-400 350,-400
  region: 2350,300 675,300 650,325 650,400 2350,400
  lines w5: 894.72,170.28 549.72,170.28 525,195 525,300 ; 895,170 920,145 ; 919.93,145.07 919.93,40 919.93,-119.93 1010,-210 2150,-210 2175,-235 2175,-300 ; 2350,-100 2350,200 2275,200 2250,175 2250,-75 2275,-100 2350.1,-100 ; 525,300 475,300 450,325 450,400 550,400 550,325 525,300 ; 2175,-300 2150,-325 2150,-400 2250,-400 2250,-325 2225,-300 2175,-300 ; 350,-400 350,-300 2025,-300 2050,-325 2050,-400 350,-400 ; 650,325 675,300 2350,300 2350,400 650,400 650,325

## Silkscreen, mask and mechanical layers (free items; w line width, h text height)
Top Overlay:
  text "5V" at 350,265 h32
  text "GND" at 450,265 h32
  text "3V3" at 550,265 h32
  text "B10" at 650,265 h32
  text "B2" at 750,265 h32
  text "B1" at 850,265 h32
  text "B0" at 950,265 h32
  text "A7" at 1050,265 h32
  text "A6" at 1150,265 h32
  text "A5" at 1250,265 h32
  text "A4" at 1350,265 h32
  text "A3" at 1450,265 h32
  text "A2" at 1550,265 h32
  text "A1" at 1650,265 h32
  text "A0" at 1750,265 h32
  text "RST" at 1850,265 h32
  text "C15" at 1950,265 h32
  text "C14" at 2050,265 h32
  text "C13" at 2150,265 h32
  text "VB" at 2250,265 h32
  text "RST" at 1035,150 h45
  text "GND" at 2050,110 h60
  text "SCK" at 2050,10 h60
  text "DIO" at 2050,-90 h60
  text "3V3" at 2050,-190 h60
  text "BOOT0" at 937,-224.49 h45
  text "STM32F4x1" at 1450,-240 h45
  text "KEY" at 1875,-240 h45
  text "V1.0" at 2222,-255 h32
  text "B12" at 350,-310 h32
  text "B13" at 450,-310 h32
  text "B14" at 550,-310 h32
  text "B15" at 650,-310 h32
  text "A8" at 750,-310 h32
  text "A9" at 850,-310 h32
  text "A10" at 950,-310 h32
  text "A11" at 1050,-310 h32
  text "A12" at 1150,-310 h32
  text "A15" at 1250,-310 h32
  text "B3" at 1350,-310 h32
  text "B4" at 1450,-310 h32
  text "B5" at 1550,-310 h32
  text "B6" at 1650,-310 h32
  text "B7" at 1750,-310 h32
  text "B8" at 1850,-310 h32
  text "B9" at 1950,-310 h32
  text "5V" at 2050,-310 h32
  text "GND" at 2150,-310 h32
  text "3V3" at 2250,-310 h32
Bottom Overlay:
  text "5V" at 450,245 h32
  text "GND" at 550,245 h32
  text "3V3" at 650,245 h32
  text "B10" at 750,245 h32
  text "B2" at 850,245 h32
  text "B1" at 950,245 h32
  text "B0" at 1050,245 h32
  text "A7" at 1150,245 h32
  text "A6" at 1250,245 h32
  text "A5" at 1350,245 h32
  text "A4" at 1450,245 h32
  text "A3" at 1550,245 h32
  text "A2" at 1650,245 h32
  text "A1" at 1750,245 h32
  text "A0" at 1850,245 h32
  text "RST" at 1950,245 h32
  text "C15" at 2050,245 h32
  text "C14" at 2150,245 h32
  text "C13" at 2250,245 h32
  text "VB" at 2350,245 h32
  text "OldGerman" at 643.5,202 h32
  text "GND" at 2220,120 h60
  text "JLCJLCJLCJLC" at 1740,90 h32
  text "SCK" at 2220,20 h60
  text "U3" at 1010,-31 h32 r270
  text "F4x1 DEV BRD" at 1895,-53 h114.17
  text "DIO" at 2215,-80 h60
  text "SOIC-8" at 959,-90 h32 r270
  text "HOST / OUT / 5V" at 765,-105 h32
  text "3V3" at 2220,-180 h60
  text "2022/04" at 643.13,-236 h32
  text "V1.0" at 2334,-236 h32
  text "B12" at 450,-290 h32
  text "B13" at 550,-290 h32
  text "B14" at 650,-290 h32
  text "B15" at 750,-290 h32
  text "A8" at 850,-290 h32
  text "A9" at 950,-290 h32
  text "A10" at 1050,-290 h32
  text "A11" at 1150,-290 h32
  text "A12" at 1250,-290 h32
  text "A15" at 1350,-290 h32
  text "B3" at 1450,-290 h32
  text "B4" at 1550,-290 h32
  text "B5" at 1650,-290 h32
  text "B6" at 1750,-290 h32
  text "B7" at 1850,-290 h32
  text "B8" at 1950,-290 h32
  text "B9" at 2050,-290 h32
  text "5V" at 2150,-290 h32
  text "GND" at 2250,-290 h32
  text "3V3" at 2350,-290 h32
Mechanical 1:
  lines w5: 350,-400 2350,-400 2350,400 350,400 350,0 350,-400
Mechanical 15:
  lines w5: 360,-260 2340,-260 ; 360,260 2340,260 ; 360,-390 2340,-390 2340,390 360,390 360,-390 ; 1228.79,-9.74 1228.79,9.74 1239.93,20.88 1245.49,20.88 1252.45,13.92 1252.45,8.35 1248.97,4.87 1248.97,-4.87 1377.73,-133.63 1377.73,-139.19 1370.77,-146.15 1365.2,-146.15 1228.79,-9.74 ; 1253.85,29.23 1260.81,22.27 1266.37,22.27 1395.13,151.03 1404.87,151.03 1450.11,105.79 1455.68,105.79 1462.64,112.75 1462.64,118.32 1409.74,171.21 1390.26,171.21 1253.85,34.8 1253.85,29.23 ; 1379.12,-160.07 1390.26,-171.21 1409.74,-171.21 1546.15,-34.8 1546.15,-29.23 1539.19,-22.27 1533.63,-22.27 1404.87,-151.03 1395.13,-151.03 1391.65,-147.55 1386.08,-147.55 1379.12,-154.51 1379.12,-160.07 ; 1464.03,91.87 1551.03,4.87 1551.03,-4.87 1547.55,-8.35 1547.55,-13.92 1554.51,-20.88 1560.07,-20.88 1571.21,-9.74 1571.21,9.74 1476.56,104.4 1470.99,104.4 1464.03,97.44 1464.03,91.87

## Text inside footprints (layer, text, board x,y; h text height)
U1: Mechanical 13 "*" at 1559.53,27.85 h50 r225
U3: Mechanical 13 "*" at 1003,-103.5 h50 r270